# Altium PCB E1811HUBPCBA_3.PcbDoc
Units mil, origin at the board's own origin, x right, y up, seen from the top; angles counter-clockwise.
Board outline 2300 x 1600 mil, 2 copper layers (Top Layer, Bottom Layer); 3 components, 39 nets, 54 pads, 2 vias.
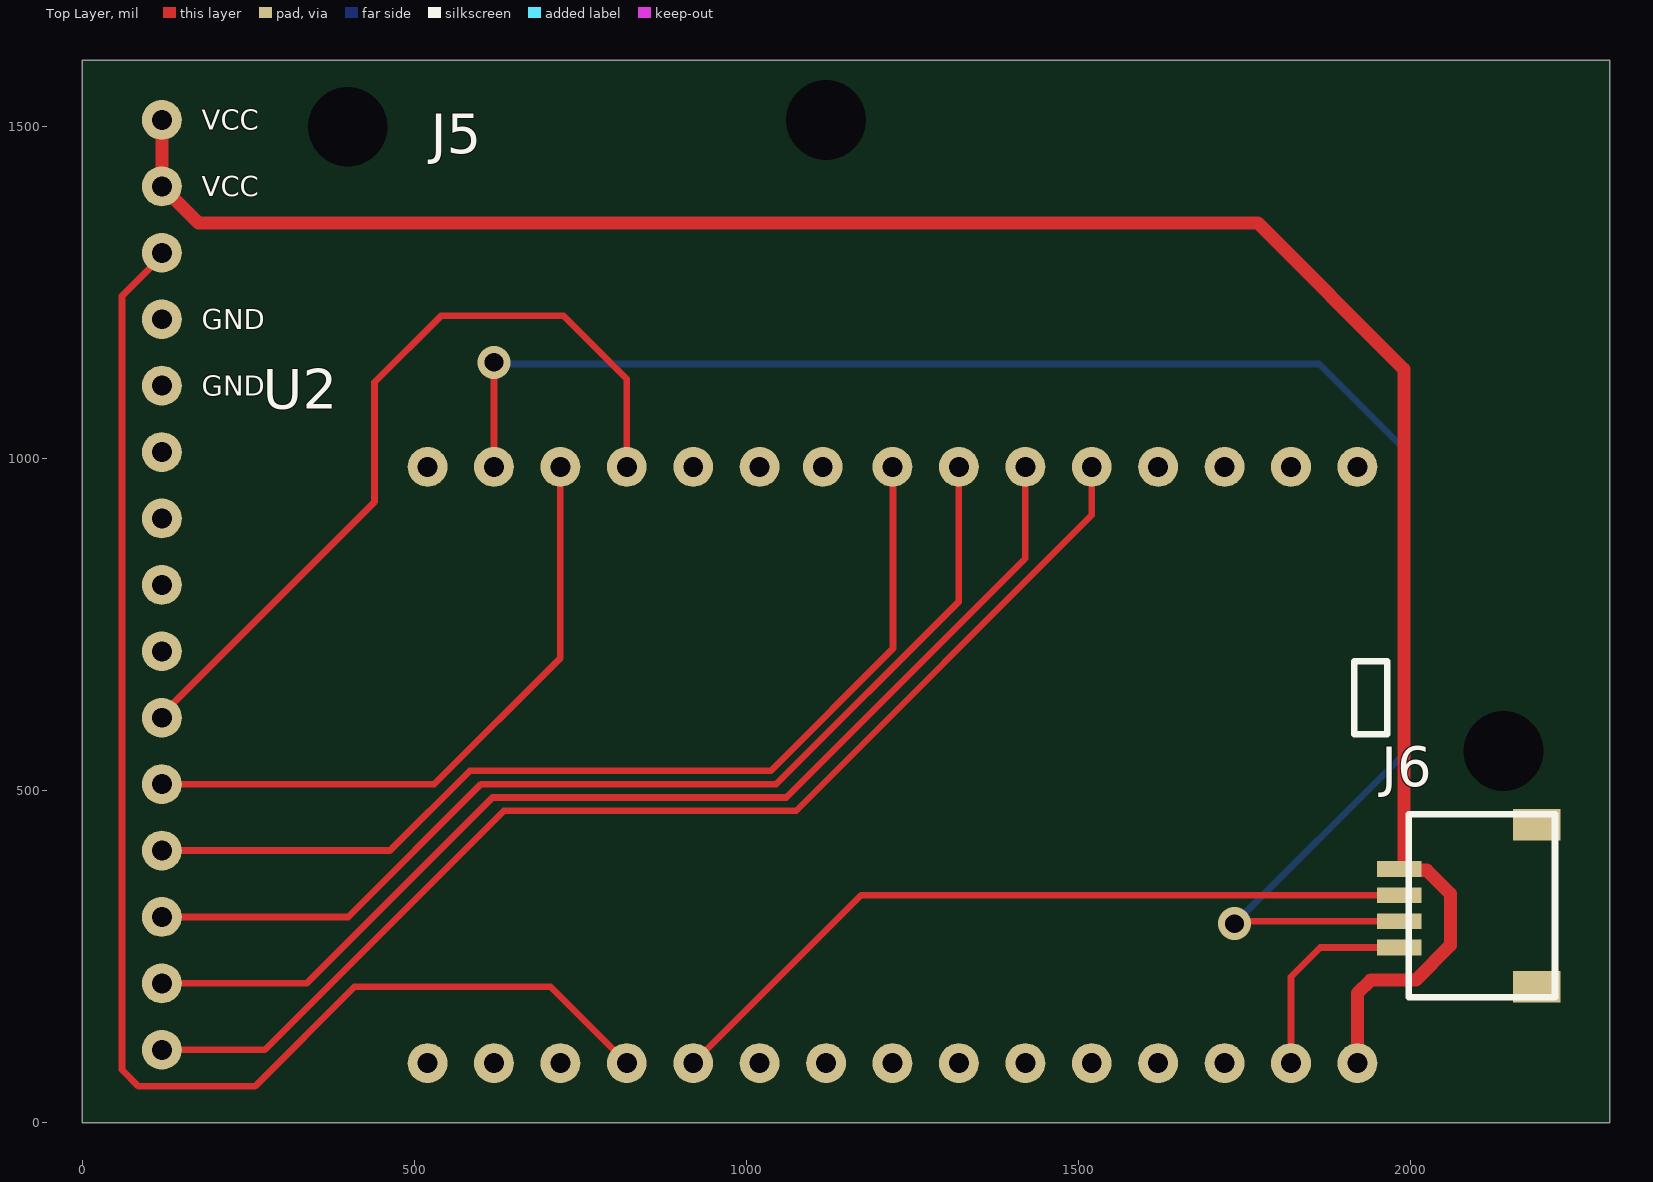
[diagram p0: Top Layer view]
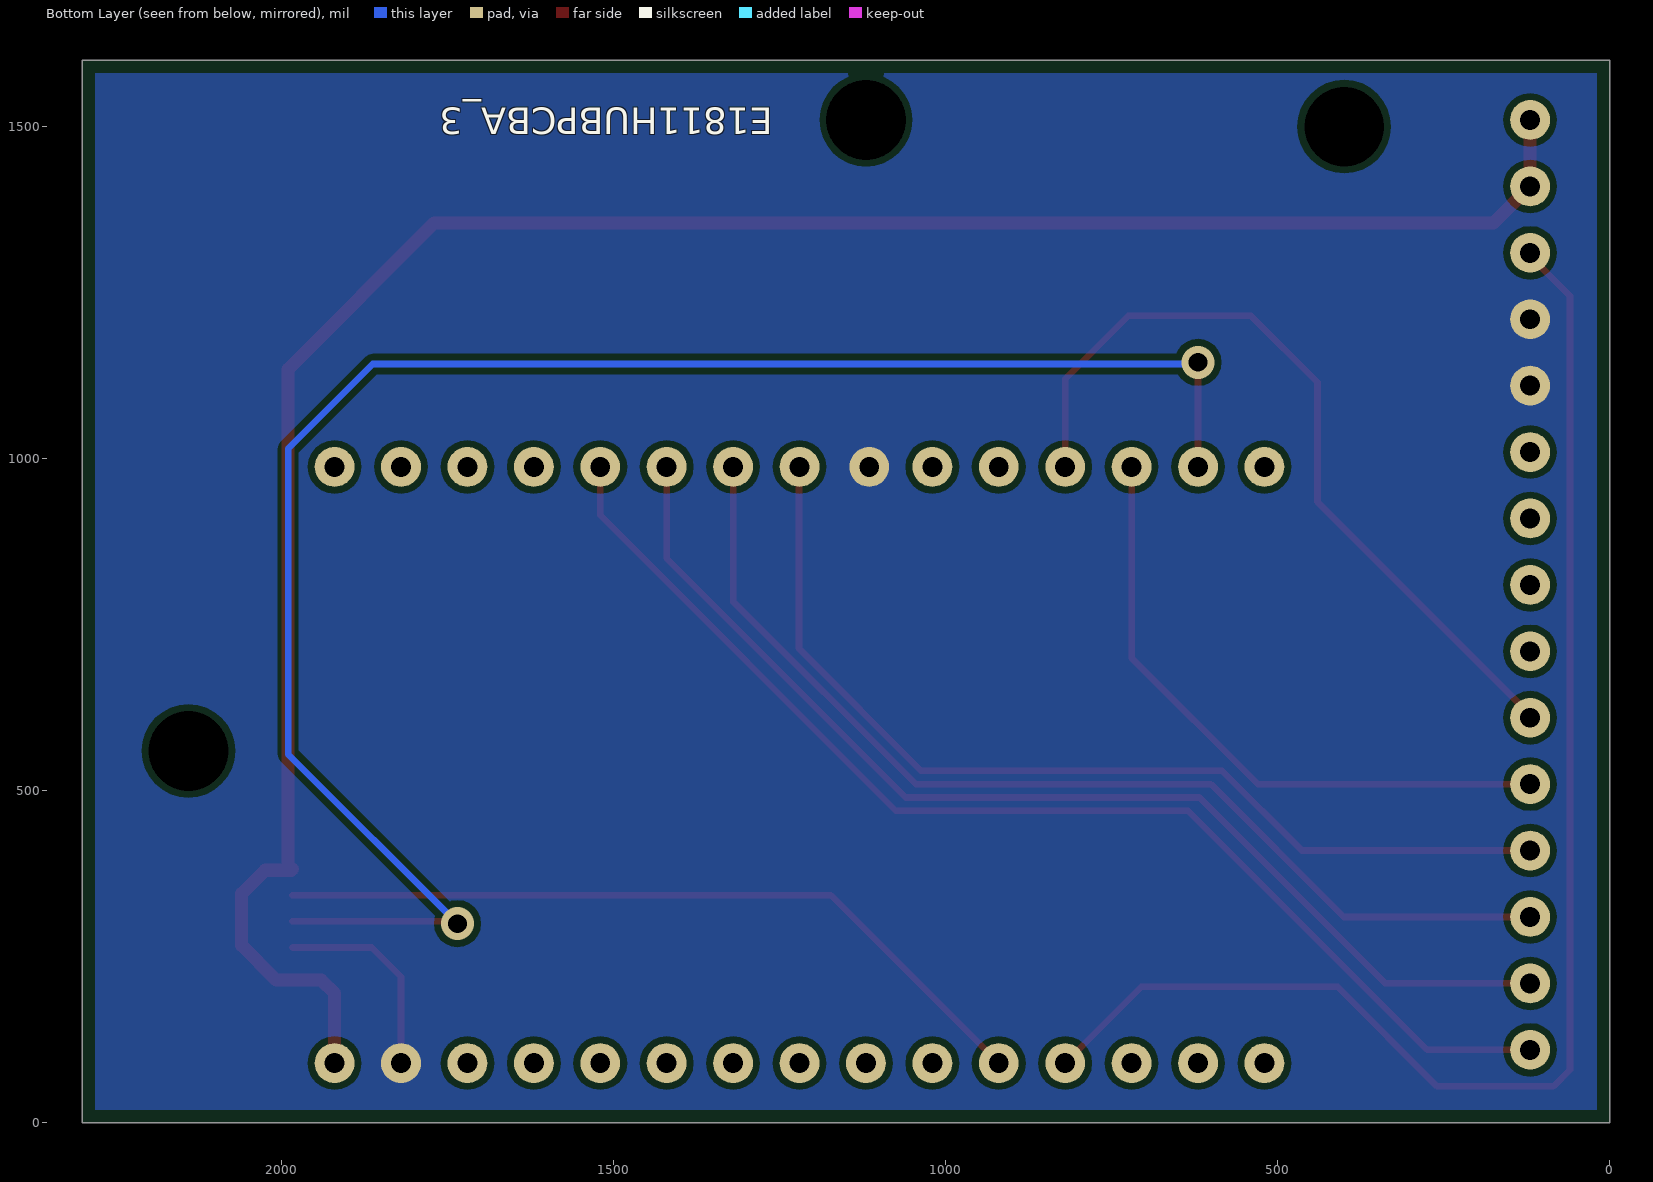
[diagram p1: Bottom Layer view, seen from below]
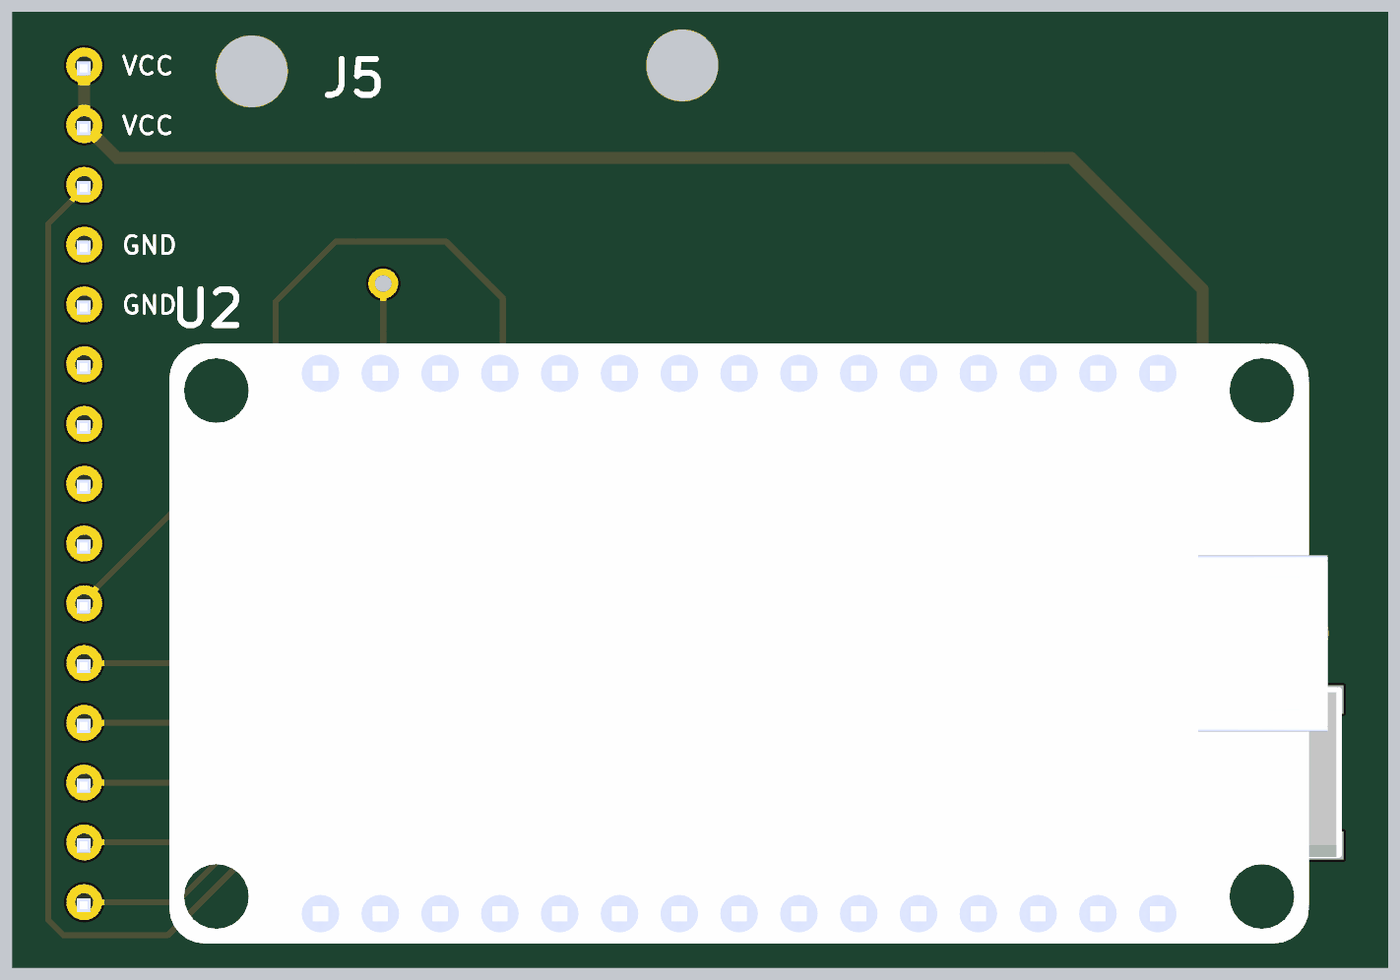
[diagram p2: 3D render of the assembled board from above, using the file's embedded part models]

## Layer stack, top to bottom
Top Solder: solder mask 0.4, Solder Resist, Dk 3.5
Top Layer: signal copper 1.4
Dielectric 1: dielectric 12.6, FR-4, Dk 4.8
Bottom Layer: signal copper 1.4
Bottom Solder: solder mask 0.4, Solder Resist, Dk 3.5

## Board outline
0,0 0,1600 2300,1600 2300,0

## Design rules (kind name [scope] priority, off if disabled: settings)
Clearance [All] p1: gap=10 ignorepadtopadclearanceinfootprint=FALSE except(0: Arc-Hole Track-Hole SMDPad-Hole THPad-Hole Via-Hole Fill-Hole Poly-Hole Region-Hole Text-Hole)
PlaneConnect [All] p1: planeconnectstyle=Direct reliefexpansion=20 reliefentries=4 reliefconductorwidth=10 reliefairgap=10
PolygonConnect [All] p1: connectstyle=Direct reliefconductorwidth=10 reliefentries=4 polygonreliefangle="90 Angle" airgapwidth=10
RoomDefinition Sheet1 [InComponentClass('Sheet1')] p1: confinementstyle=ConfineIn formatcopy=TRUE lockcomponents=FALSE outline 2345,60 13945,60 13945,2110 2345,2110
RoutingVias [All] p1: holewidth=28 width=50 viastyle="Through Hole" minholewidth=28 minwidth=50 maxholewidth=28 maxwidth=50
SolderMaskExpansion [All] p1: expansion=4 istentingtop=FALSE
Width [All] p1: maxlimit=50 minlimit=10 preferedwidth=10
29 further rules are at their usual default settings.

## Components (designator, comment, footprint, x,y, rotation, side; value= is the part's Value field where it differs from the comment)
J5 "61301511121" 61301511121 120,110 r90 top
J6 "84981-4" 84981-4 2217.56,189.25 r90 top
U2 "ESP8266MOD" ESP8266NODEMCU 520,90 r90 top

## Footprints (in the part's own frame and the unit in brackets; to place one, negate y for a bottom-side part, rotate by r counter-clockwise, add the part's x,y. Pads: shape width x height; smd on the part's side, far side on the other; paste and mask are expansions set on the pad)
84981-4 [mm]
  rect 1.2x1.8 smd: 0(0.4,0.7) 0(6.6,0.7)
  rect 0.6x1.7 smd: 1(1.9,5.95) 2(2.9,5.95) 3(3.9,5.95) 4(4.9,5.95)
  silkscreen extent 0,0 7,5.6, body extent -0.1,0.1 6.9,6.4, height 3
61301511121 [mil]
  round 60 hole 30: 1(0,0) 2(100,0) 3(200,0) 4(300,0) 5(400,0) 6(500,0) 7(600,0) 8(700,0) 9(800,0) 10(900,0) 11(1000,0) 12(1100,0) 13(1200,0) 14(1300,0) 15(1400,0)
  body extent -54,-48 1444,50, height 85
ESP8266NODEMCU [mil] "NODEMCU ESP8266"
  round 60 hole 30: 1(0,0) 2(0,-100) 3(0,-200) 4(0,-300) 5(0,-400) 6(0,-500) 7(0,-600) 8(0,-700) 9(0,-800) 10(0,-900) 11(0,-1000) 12(0,-1100) 13(0,-1200) 14(0,-1300) 15(0,-1400) 16(897.64,-1400) 17(897.64,-1300) 18(897.64,-1200) 19(897.64,-1100) 20(897.64,-1000) 21(897.64,-900) 22(897.64,-800) 23(897.64,-700) 24(897.64,-595) 25(897.64,-500) 26(897.64,-400) 27(897.64,-300) 28(897.64,-200) 29(897.64,-100) 30(897.64,0)
  body extent -49,-1679 955,258, height 299

## Part data
J5: "WURTH ELEKTRONIK         61301511121            Board-To-Board Connector, Vertical, WR-PHD Series, Through Hole, Header, 15 Contacts, 2.54 mm", Color=Black, Manufacturer="Wurth Electronics", Supplier Part Number 1=732-5326-ND, Category=Connectors, ComponentLink1Description=http://www.farnell.com/cad/1737268.pdf?src-supplier=Element14, ComponentLink1URL=http://www.farnell.com/cad/1737268.pdf?src-supplier=Element14, ComponentLink2Description=https://katalog.we-online.de/em/datasheet/6130xx11121.pdf?src-supplier=Digi-Key, ComponentLink2URL=https://katalog.we-online.de/em/datasheet/6130xx11121.pdf?src-supplier=Digi-Key, Connector Type="Male Pin", Contact Material=Copper, Contact Mating Length=0.236inch, Contact Plating=Gold, Gender=Male, Manufacturer Part Number=61301511121, Mount="Through Hole", Number of Contacts=15, Number of Positions=15, Number of Rows=1, Packaging=Bulk, Pitch=0.1inch, Pricing 1="1=0.82000, 10=0.69700, 25=0.58120, 50=0.48400, 100=0.44000, 500=0.40000 (USD)", REACH SVHC=Unknown, RoHS=Yes, RoHS Compliant=Yes, Stock 1=961, Supplier 1=Digi-Key, Termination=Solder

## Free pads (board coordinates)
  round 60 hole 120: 0(400,1500) 0(1120,1510) 0(2140,560)

## Via types
v1: diameter 50, hole 28, Top Layer to Bottom Layer, 2 vias

## Nets (pads, with @x,y where several pads share a name; then routed paths per layer and width w, separated by ;. In a path a pad name is that pad's centre, name@x,y a point inside that pad or via, vN(x,y) a via of type N, cw(c..) or ccw(c..) an arc to the next point about the centre after c; other vN are vias at no path point)
GND: J5.11 J5.12 J6.1 U2.14 U2.24 | length 311.6
  Top Layer w10: U2.14 1820,220 1864.06,264.06 J6.1
NetC1_2: 
NetC4_2: 
NetC5_2: 
NetC6_2: 
NetC7_2: 
NetC8_2: 
NetC9_2: 
NetJ3_1: 
NetJ3_2: 
NetJ3_3: 
NetJ4_1: J5.1 U2.20 | length 1806.1
  Top Layer w10: J5.1 275,110 635,470 1075,470 1520,915 U2.20
NetJ4_2: J5.2 U2.21 | length 1702.7
  Top Layer w10: J5.2 337.81,210 617.81,490 1060,490 1420,850 U2.21
NetJ4_3: J5.3 U2.22 | length 1599.4
  Top Layer w10: J5.3 400.62,310 600.62,510 1045,510 1320,785 U2.22
NetJ4_4: J5.4 U2.23 | length 1500.7
  Top Layer w10: J5.4 463.43,410 583.43,530 1036.72,530 1220.86,714.14 1220.86,986.78 U2.23
NetJ4_5: J5.5 U2.28 | length 966.3
  Top Layer w10: J5.5 530,510 720,700 U2.28
NetJ4_6: J5.6 U2.27 | length 1230.7
  Top Layer w10: J5.6 120,615 440,935 440,1115 540,1215 725,1215 820,1120 U2.27
NetJ4_13: 
NetJ5_13: J5.13 U2.4 | length 2142
  Top Layer w10: J5.13@125,1315 J5.13 120,1305 60,1245 60,80 85,55 260,55 410,205 705,205 U2.4
NetJ6_2: J6.2 U2.29 | length 2641.7
  Top Layer w10: U2.29 v1(620,1145) ; v1@1743.43,303.43 J6.2
  Bottom Layer w10: v1(620,1145) 622.5,1142.5 1862.5,1142.5 1990,1015 1990,555 v1(1735,300)
NetJ6_3: J6.3 U2.5 | length 1168
  Top Layer w10: U2.5 1172.8,342.8 J6.3
NetJ7_1: 
NetJ7_2: 
NetJ7_3: 
NetJ7_4: 
NetJ7_5: 
NetJ7_6: 
NetJ7_7: 
NetJ7_8: 
NetJ7_9: 
NetJ7_10: 
NetJ7_11: 
NetLED1_1: 
NetLED2_1: 
NetLED3_1: 
NetLED4_1: 
NetLED5_1: 
NetQ1_3: 
VCC: J5.14 J5.15 J6.4 U2.15 | length 3287.2
  Top Layer w20: J5.15 J5.14 175,1355 1770,1355 1990,1135 1990,383.98 1988.19,382.17 J6.4 1985.12,380.35 2024.65,380.35 2060,345 2060,267.19 2007.81,215 1940,215 1920,195 U2.15
pads on no net: J5.7 J5.8 J5.9 J5.10 J6.0 U2.1 U2.2 U2.3 U2.6 U2.7 U2.8 U2.9 U2.10 U2.11 U2.12 U2.13 U2.16 U2.17 U2.18 U2.19 U2.25 U2.26 U2.30
copper on no net: | length 14.9
  Top Layer w10: 120,710 127,717 ; 120,810 120,815

## Polygon pours and split planes (outlines as drawn)
GND on Bottom Layer "GND_L02_P000" (solid, pour order 0): 20,1580 2280,1580 2280,20 20,20

## Silkscreen, mask and mechanical layers (free items; w line width, h text height)
Top Overlay:
  lines w10: 1915,585 1915,695 1965,695 1965,585 1915,585
  text "VCC" at 180,1495 h30
  text "VCC" at 180,1395 h30
  text "GND" at 180,1195 h30
  text "GND" at 180,1095 h30
Bottom Overlay:
  text "E1811HUBPCBA_3" at 1260,1528.34 h40 r180
Mechanical 1:
  the board outline again, w10